# Altium PCB tof_sideXtal.PcbDoc (part 1 of 2)
Units mm, origin at the board's own origin, x right, y up, seen from the top; angles counter-clockwise.
Board outline 22 x 110.3 mm, 6 copper layers (Top Layer, Timing, InternalPlane1, InternalPlane2, Energy, Bottom Layer); 240 components, 145 nets, 707 pads, 213 vias.
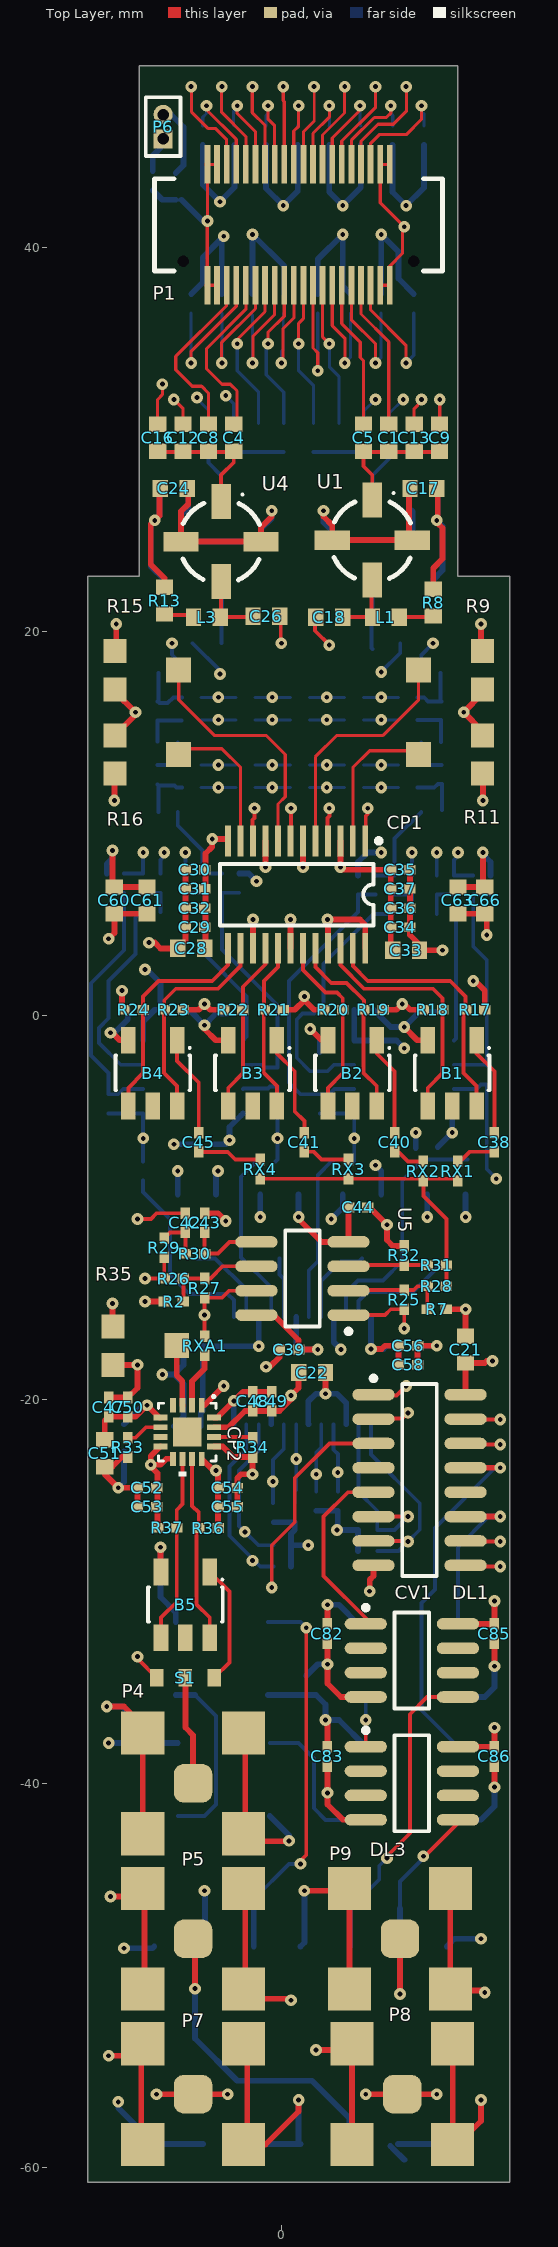
[diagram p0: Top Layer view]
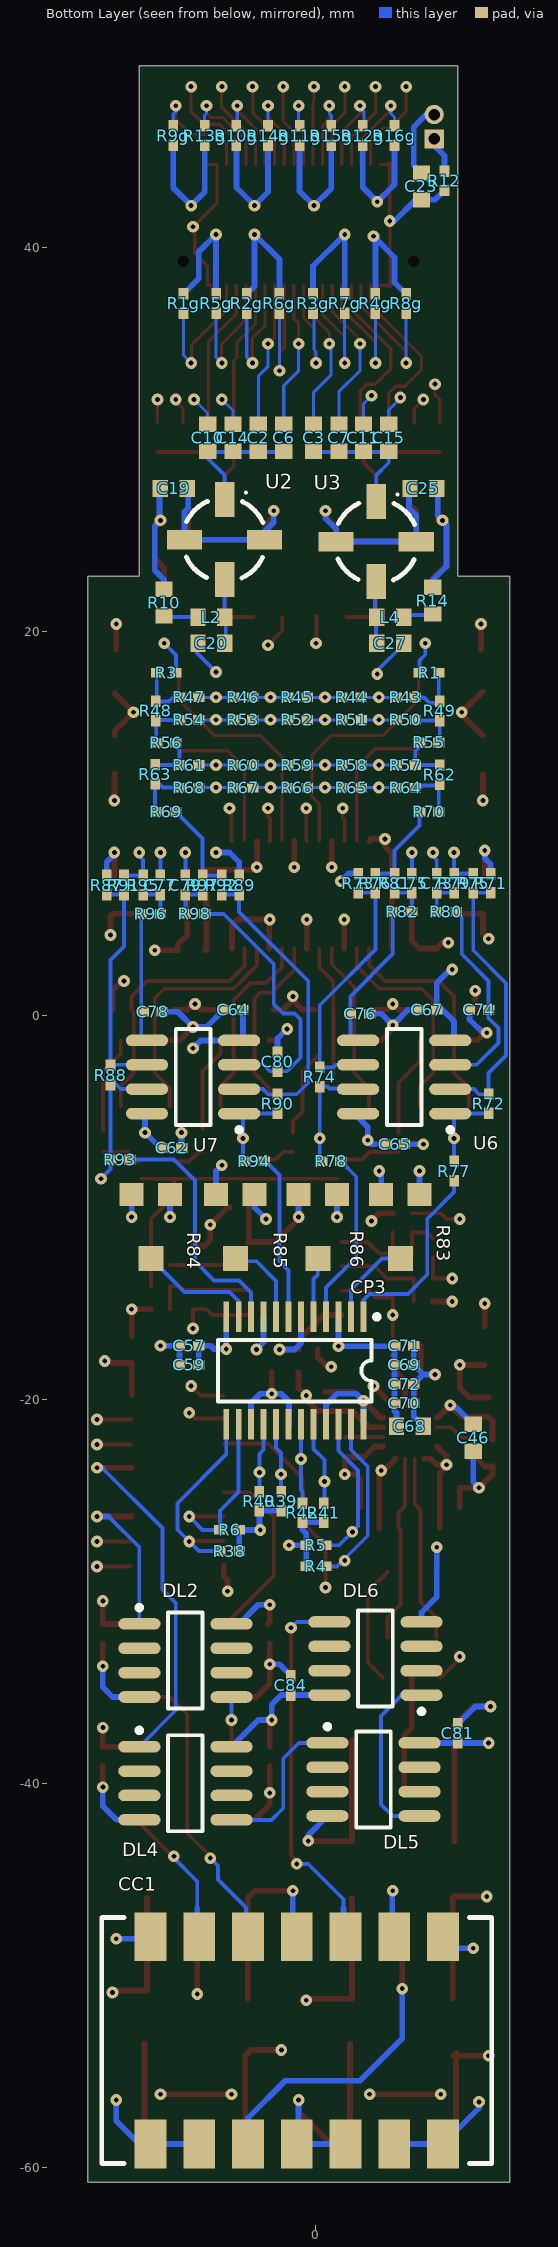
[diagram p1: Bottom Layer view, seen from below]
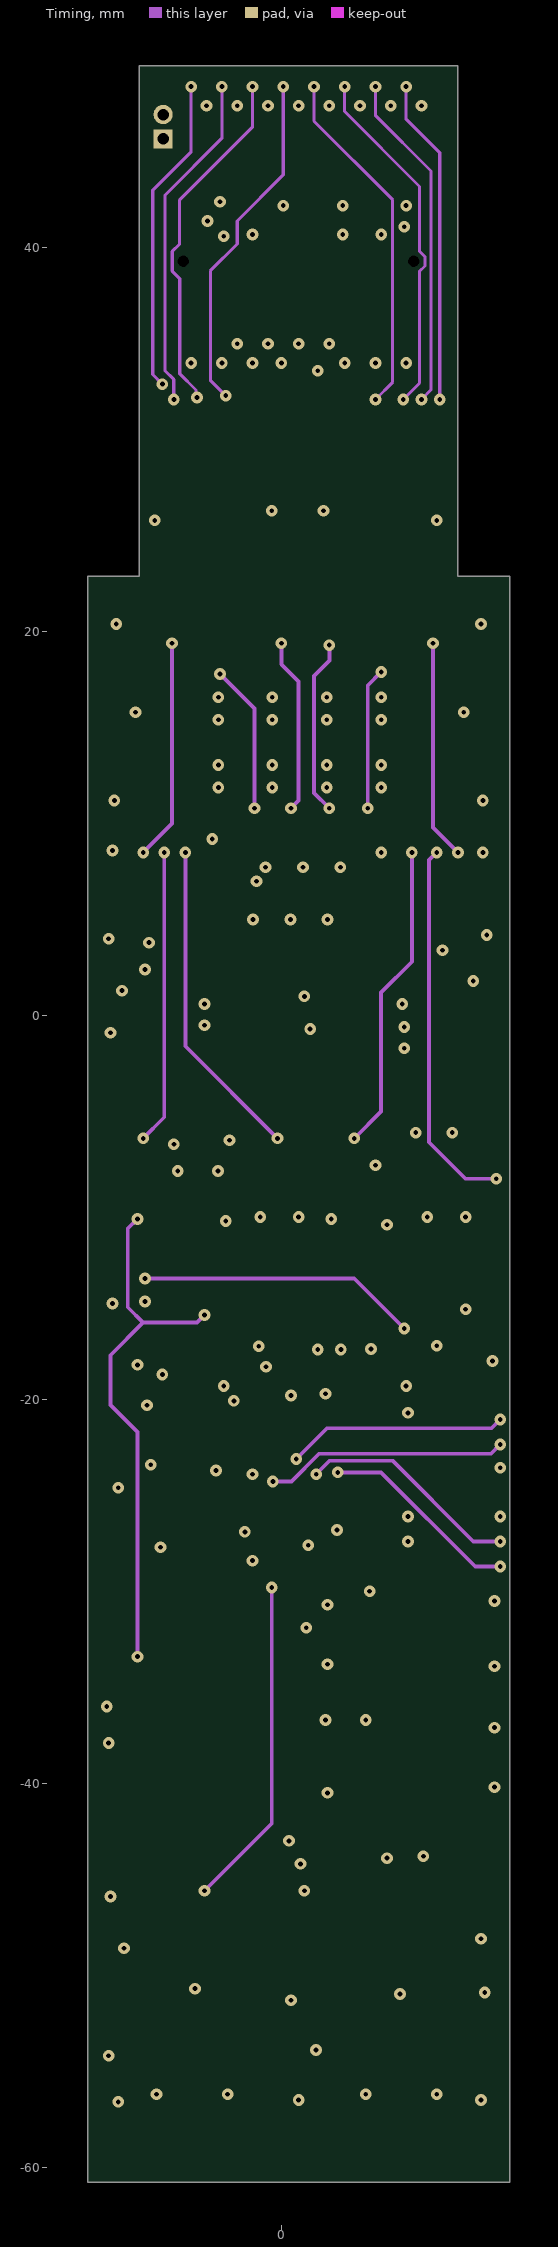
[diagram p2: Timing]
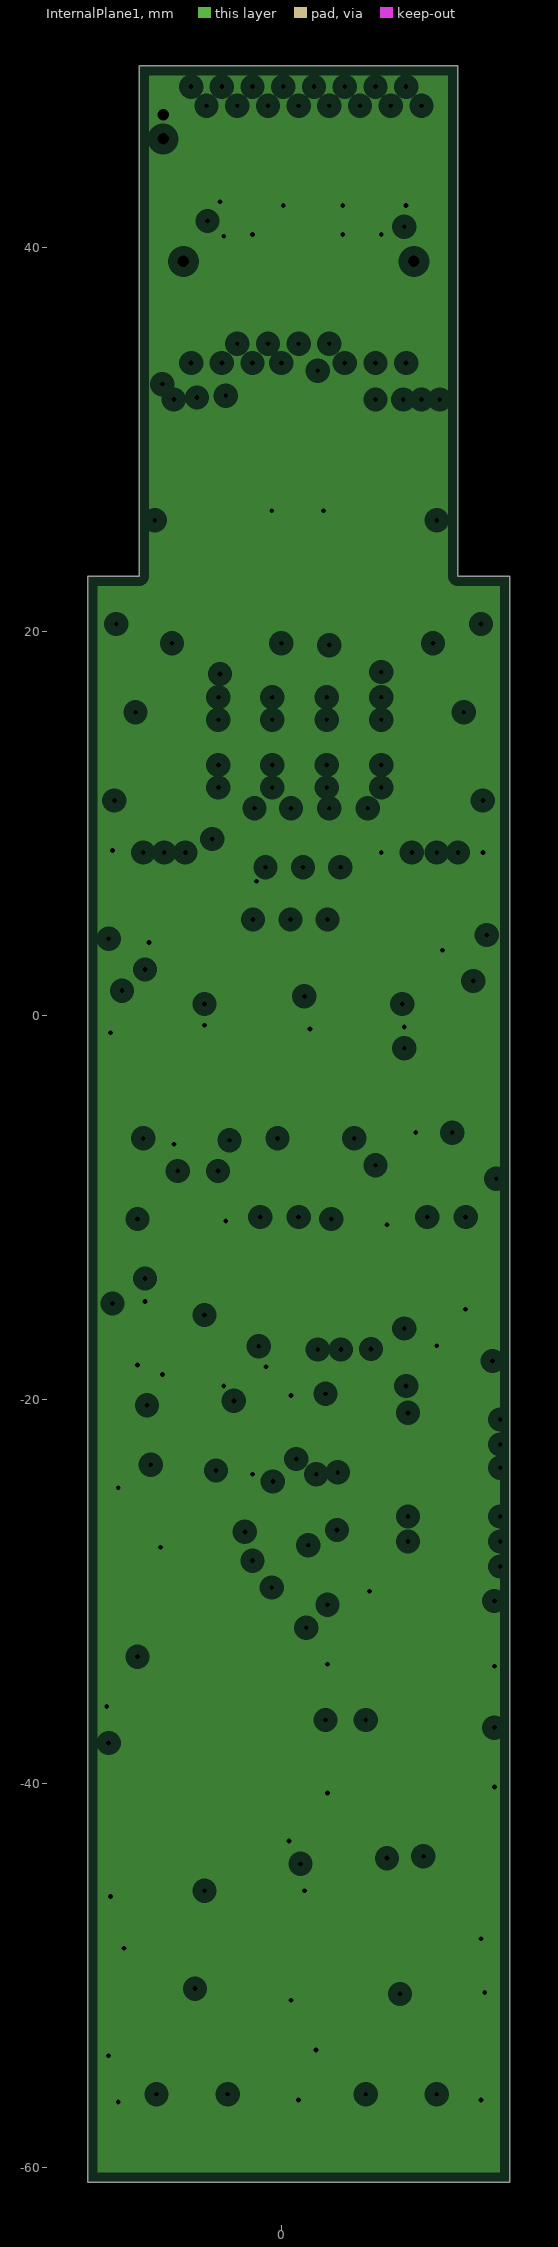
[diagram p3: InternalPlane1, clearances drawn from the general rule]
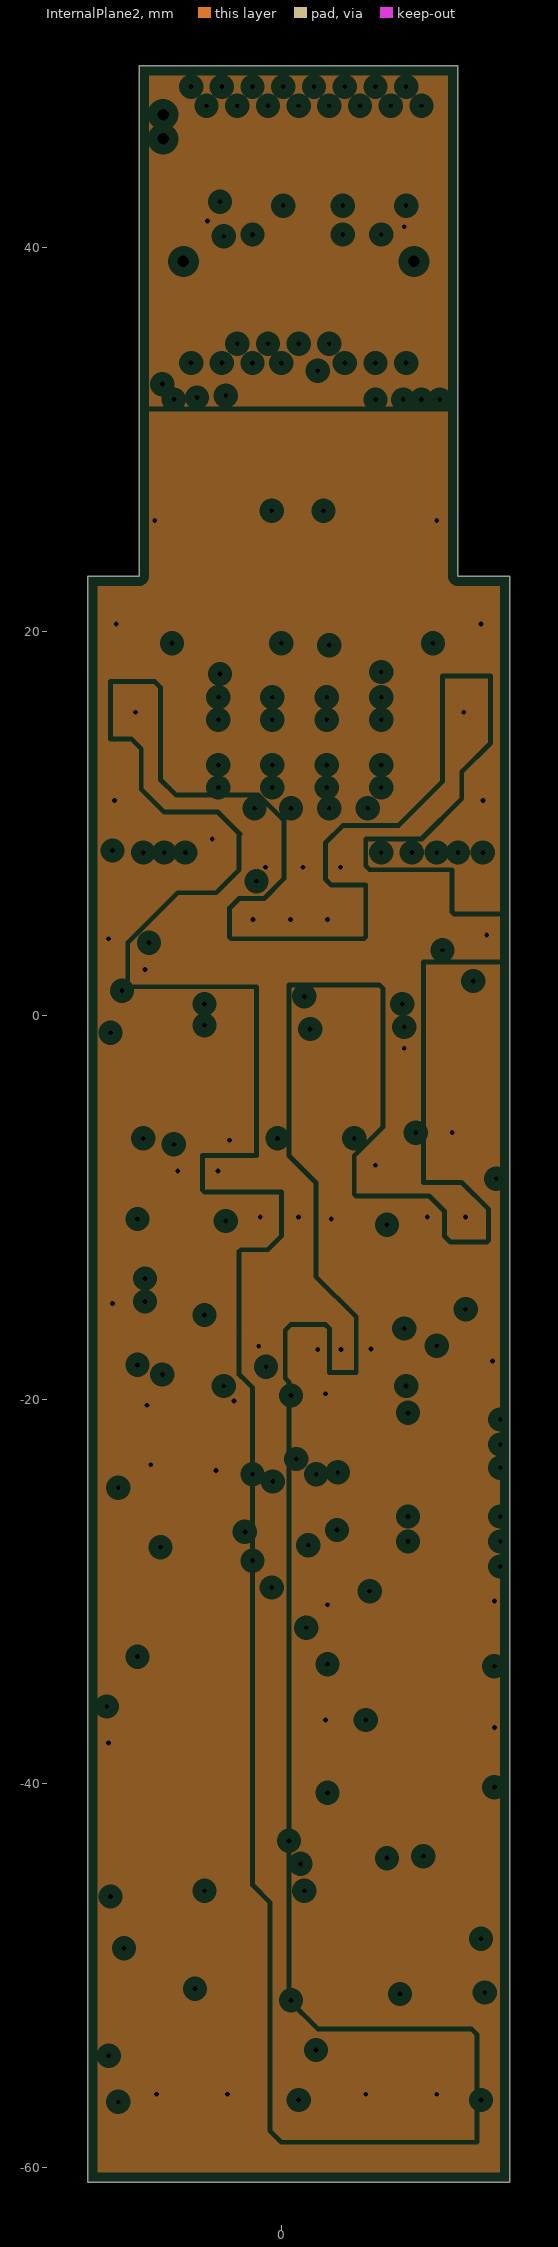
[diagram p4: InternalPlane2, clearances drawn from the general rule]
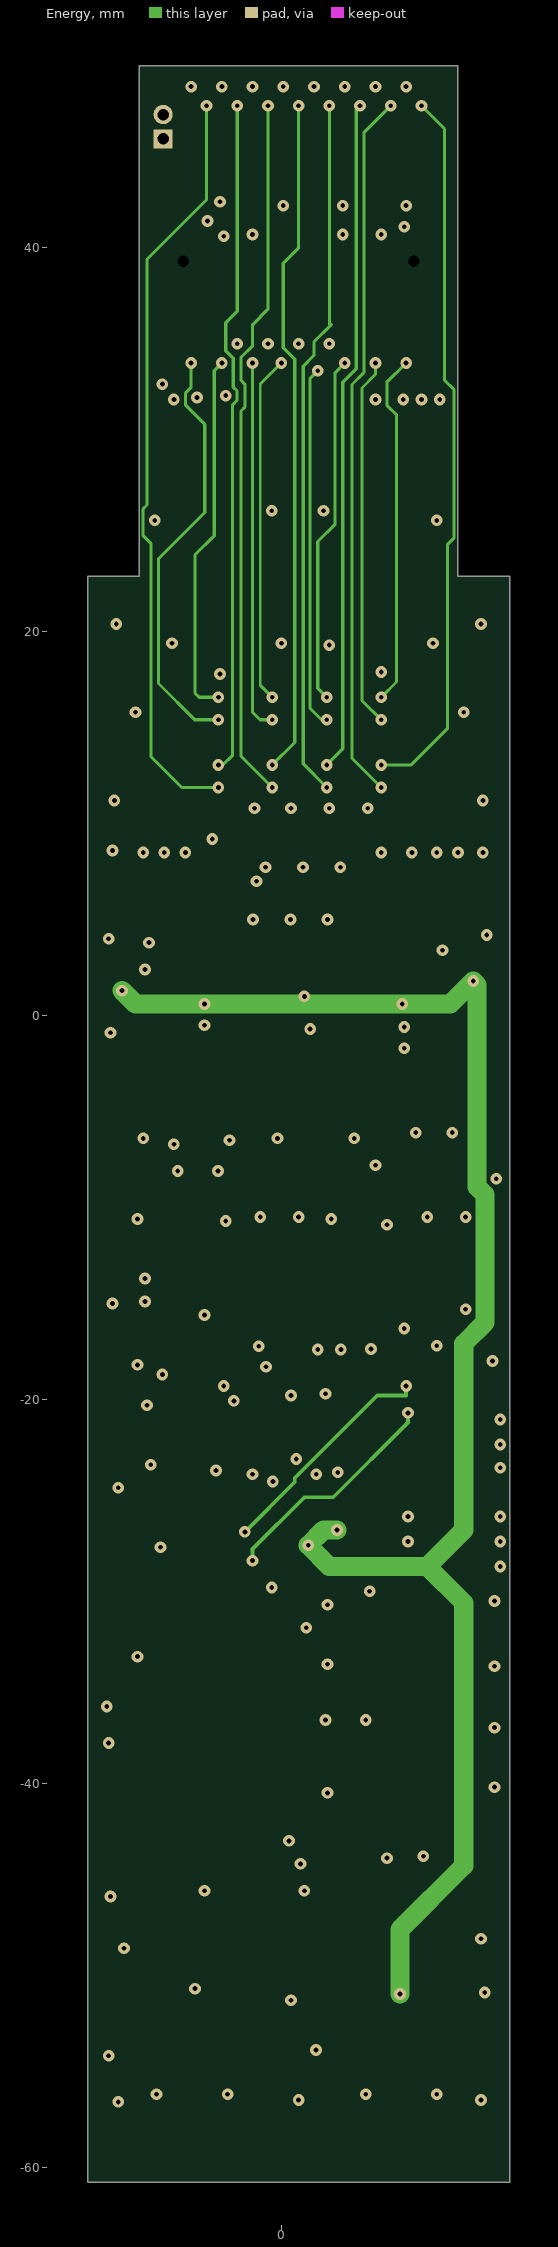
[diagram p5: Energy]

## Layer stack, top to bottom
Top Layer: signal copper 0.0356
Dielectric: prepreg 0.32, FR-4, Dk 4.8
Timing: signal copper 0.0356
Dielectric: core 0.32, FR-4, Dk 4.8
InternalPlane1: plane copper 0.0356, net GND
Dielectric: prepreg 0.32, FR-4, Dk 4.8
InternalPlane2: plane copper 0.0356, net (Multiple Nets)
Dielectric: core 0.32, FR-4, Dk 4.8
Energy: signal copper 0.0356
Dielectric: prepreg 0.32, FR-4, Dk 4.8
Bottom Layer: signal copper 0.0356

## Board outline
-10.1,-60.8 -10.1,22.9 -7.4,22.9 -7.4,49.5 9.2,49.5 9.2,22.9 11.9,22.9 11.9,-60.8

## Design rules (kind name [scope] priority, off if disabled: settings)
Clearance Clearance_2 [(InComponent('J1') OR InComponent('CP2'))] p1: gap=0.152
Clearance Clearance_1 [IsTrack vs IsVia OR IsPad] p2: gap=0.203
Clearance [All] p3: gap=0.16
ComponentClearance ComponentClearance_1 [(InComponent('P1') OR InComponentClass('PreAmpComps')) vs (InComponent('P6') OR InComponent('U1')OR InComponent('U2')OR InComponent('U3')OR InComponent('U4'))] p1: gap=0 collisioncheckmode=3 verticalgap=0 showdistances=FALSE
ComponentClearance [All] p2: gap=0.254 collisioncheckmode=3 verticalgap=0.254 showdistances=FALSE
HoleSize [All] p1: absolutevalues=TRUE maxlimit=2.54 minlimit=0.21 maxpercent=80.000 minpercent=20.000
MinimumAnnularRing [All] p1: minimumring=0.18
MinimumSolderMaskSliver MinimumSolderMaskSliver_1 [InComponent('SiPM1')] p1: minsoldermaskwidth=0.05
MinimumSolderMaskSliver [All] p2: minsoldermaskwidth=0.05
PasteMaskExpansion [InComponent('SiPM1')] p1: expansion=0
PlaneClearance [All] p1: clearance=0.508
PlaneConnect PlaneConnect_1 [IsVia AND InNet('GND')] p1: planeconnectstyle=Direct reliefexpansion=0.508 reliefentries=4 reliefconductorwidth=0.254 reliefairgap=0.254
PlaneConnect [All] p2: planeconnectstyle=Relief reliefexpansion=0.508 reliefentries=4 reliefconductorwidth=0.254 reliefairgap=0.254
PolygonConnect [All] p1: connectstyle=Relief reliefconductorwidth=0.254 reliefentries=4 polygonreliefangle="90 Angle"
RoutingTopology [All] p1: topology=Daisy_Balanced
RoutingVias [All] p1: holewidth=0.21 width=0.61 viastyle="Through Hole" minholewidth=0.203 minwidth=0.61 maxholewidth=0.5 maxwidth=0.75
SilkToSilkClearance [All] p1: silktosilkclearance=0.127
SilkscreenOverComponentPads SilkscreenOverComponentPads_1 [HasFootprint('J1-0603')] p1: minsilkscreentomaskgap=0.1
SilkscreenOverComponentPads [All] p2: minsilkscreentomaskgap=0.127
SolderMaskExpansion SolderMaskExpansion_1 [IsVia] p1: expansion=0.077
SolderMaskExpansion [All] p2: expansion=0.08
ViasUnderSMD [All] p1: allowed=FALSE
Width Width_3 [(InNet('+3V')AND OnLayer('Energy'))] p1: maxlimit=1 minlimit=0.254 preferedwidth=1 toplayer_maxwidth=0.254 toplayer_prefwidth=0.254 midlayer1_maxwidth=0.254 midlayer1_prefwidth=0.254 midlayer2_minwidth=1 bottomlayer_maxwidth=0.254 bottomlayer_prefwidth=0.254 minimp=50.000000 maximp=50.000000 favimp=50.000000
Width Width_2 [InNetClass('SiPMConns')] p2: maxlimit=0.165 minlimit=0.152 preferedwidth=0.16 minimp=50.000000 maximp=50.000000 favimp=50.000000
Width Width_1 [(InNet('GND') OR InNet('+5') OR InNet('-5')OR InNet('+3')OR InNet('+30'))] p3: maxlimit=0.5 minlimit=0.254 preferedwidth=0.5 toplayer_minwidth=0.3 toplayer_prefwidth=0.305 midlayer1_minwidth=0.5 midlayer2_maxwidth=0.381 midlayer2_prefwidth=0.305 bottomlayer_minwidth=0.3 bottomlayer_maxwidth=0.381 bottomlayer_prefwidth=0.305 minimp=50.000000 maximp=50.000000 favimp=50.000000
Width [All] p4: maxlimit=0.3 minlimit=0.152 preferedwidth=0.2 minimp=50.000000 maximp=50.000000 favimp=50.000000
19 further rules are at their usual default settings.

## Classes and differential pairs
component class to_sideXtal_energy_delays: C81 C82 C83 C84 C85 C86 CC1 DL1 DL2 DL3 DL4 DL5 DL6 P5 P6 P7 P8 P9
component class to_sideXtal_energy: C21 C22 C56 C57 C58 C59 C60 C61 C62 C63 C64 C65 C66 C67 C68 C69 C70 C71 C72 C73 C74 C75 C76 C77 C78 C79 C80 CP3 CV1 R1 R3 R4 R5 R6 R38 R39 R40 R41 R42 R43 R44 R45 R46 R47 R48 R49 R50 R51 R52 R53 R54 R55 R56 R57 R58 R59 R60 R61 R62 R63 R64 R65 R66 R67 R68 R69 R70 R71 R72 R73 R74 R75 R76 R77 R78 R79 R80 R81 R82 R83 R84 R85 R86 R87 R88 R89 R90 R91 R92 R93 R94 R95 R96 R97 R98 U6 U7
component class tof_sideXtal_timing2: B5 C38 C39 C40 C41 C42 C43 C44 C45 C46 C47 C48 C49 C50 C51 C52 C53 C54 C55 CP2 P4 R2 R7 R25 R26 R27 R28 R29 R30 R31 R32 R33 R34 R35 R36 R37 RX1 RX2 RX3 RX4 RXA1 S1 U5
component class tof_sideXtal_timing: B1 B2 B3 B4 C1 C2 C3 C4 C5 C6 C7 C8 C9 C10 C11 C12 C13 C14 C15 C16 C17 C18 C19 C20 C23 C24 C25 C26 C27 C28 C29 C30 C31 C32 C33 C34 C35 C36 C37 CP1 L1 L2 L3 L4 P1 R1g R2g R3g R4g R5g R6g R7g R8 R8g R9 R9g R10 R10g R11 R11g R12 R12g R13 R13g R14 R14g R15 R15g R16 R16g R17 R18 R19 R20 R21 R22 R23 R24 U1 U2 U3 U4
net class SiPMConns: NetC1_2 NetC2_2 NetC3_2 NetC4_2 NetC5_2 NetC6_2 NetC7_2 NetC8_2 NetC9_2 NetC10_2 NetC11_2 NetC12_2 NetC13_2 NetC14_2 NetC15_2 NetC16_2 NetP1_3 NetP1_5 NetP1_7 NetP1_9 NetP1_11 NetP1_13 NetP1_15 NetP1_17 NetP1_24 NetP1_26 NetP1_28 NetP1_30 NetP1_32 NetP1_34 NetP1_36 NetP1_38
component class PreAmpComps: C17 C19 C24 C25 R8 R10 R13 R14

## Components (designator, comment, footprint, x,y, rotation, side; value= is the part's Value field where it differs from the comment)
B1 "MABA-010125-TC1113" SM-22 8.9,-3 r0 top
B2 "MABA-010125-TC1113" SM-22 3.7,-3 r0 top
B3 "MABA-010125-TC1113" SM-22 -1.5,-3 r0 top
B4 "MABA-010125-TC1113" SM-22 -6.7,-3 r0 top
B5 "MABA-010125-TC1113" SM-22 -5,-30.7 r0 top
C1 "Cap" 1608[0603] 5.599,30.106 r90 top
C2 "Cap" 1608[0603] 2.999,30.106 r90 bottom (schematic designator C1)
C3 "Cap" 1608[0603] 0.122,30.106 r90 bottom (schematic designator C13)
C4 "Cap" 1608[0603] -2.478,30.106 r90 top (schematic designator C1)
C5 "Cap" 1608[0603] 4.278,30.106 r90 top
C6 "Cap" 1608[0603] 1.678,30.106 r90 bottom (schematic designator C5)
C7 "Cap" 1608[0603] -1.199,30.106 r90 bottom (schematic designator C9)
C8 "Cap" 1608[0603] -3.799,30.106 r90 top (schematic designator C5)
C9 "Cap" 1608[0603] 8.241,30.106 r90 top
C10 "Cap" 1608[0603] 5.641,30.106 r90 bottom (schematic designator C9)
C11 "Cap" 1608[0603] -2.478,30.106 r90 bottom (schematic designator C1)
C12 "Cap" 1608[0603] -5.12,30.106 r90 top (schematic designator C9)
C13 "Cap" 1608[0603] 6.92,30.106 r90 top
C14 "Cap" 1608[0603] 4.32,30.106 r90 bottom (schematic designator C13)
C15 "Cap" 1608[0603] -3.799,30.106 r90 bottom
C16 "Cap" 1608[0603] -6.441,30.106 r90 top (schematic designator C13)
C17 "Cap" 1608[0603] 7.402,27.464 r180 top
C18 "Cap" 1608[0603] 2.5,20.759 r180 top
C19 "Cap" 1608[0603] 7.402,27.464 r180 bottom (schematic designator C17)
C20 "Cap" 1608[0603] 5.447,19.4 r0 bottom (schematic designator C18)
C21 "Cap" 1608[0603] 9.6,-17.4 r90 top
C22 "Cap Pol3" 1608[0603] 1.6,-18.6 r180 top
C23 "Cap" 1608[0603] -5.5,43.2 r90 bottom
C24 "Cap" 1608[0603] -5.604,27.464 r0 top (schematic designator C17)
C25 "Cap" 1608[0603] -5.604,27.464 r0 bottom (schematic designator C17)
C26 "Cap" 1608[0603] -0.778,20.81 r0 top (schematic designator C18)
C27 "Cap" 1608[0603] -3.877,19.4 r180 bottom (schematic designator C18)
C28 "Cap Pol3" 1608[0603] -4.7,3.5 r180 top
C29 "Cap" 0402 -4.5,4.6 r0 top
C30 "Cap" 0402 -4.5,7.6 r0 top
C31 "Cap" 0402 -4.5,6.6 r0 top
C32 "Cap" 0402 -4.5,5.6 r0 top
C33 "Cap Pol3" 1608[0603] 6.5,3.4 r0 top
C34 "Cap" 0402 6.2,4.6 r180 top
C35 "Cap" 0402 6.2,7.6 r180 top
C36 "Cap" 0402 6.2,5.6 r180 top
C37 "Cap" 0402 6.2,6.6 r180 top
C38 "Cap" 0402 11.1,-6.6 r270 top
C39 "Cap" 0402 0.4,-17.4 r180 top
C40 "Cap" 0402 5.9,-6.6 r270 top
C41 "Cap" 0402 1.2,-6.6 r270 top
C42 "Cap" 0402 -5,-10.8 r90 top
C43 "Cap" 0402 -4,-10.8 r90 top
C44 "Cap" 0402 4,-10 r180 top
C45 "Cap" 0402 -4.3,-6.6 r270 top
C46 "Cap Pol3" 1608[0603] -8.2,-22 r270 bottom
C47 "Cap" 0402 -9,-20.4 r270 top
C48 "Cap" 0402 -1.5,-20.1 r90 top
C49 "Cap" 0402 -0.5,-20.1 r90 top
C50 "Cap" 0402 -8,-20.4 r270 top
C51 "Cap Pol3" 1608[0603] -9.2,-22.8 r270 top
C52 "Cap" 0402 -7,-24.6 r0 top
C53 "Cap" 0402 -7,-25.6 r0 top
C54 "Cap" 0402 -2.8,-24.6 r180 top
C55 "Cap" 0402 -2.8,-25.6 r180 top
C56 "Cap" 0402 6.6,-17.2 r180 top
C57 "Cap" 0402 6.608,-17.2 r180 bottom
C58 "Cap" 0402 6.6,-18.2 r180 top
C59 "Cap" 0402 6.608,-18.2 r180 bottom
C60 "Cap Pol3" 1608[0603] -8.7,6 r90 top
C61 "Cap Pol3" 1608[0603] -7,6 r90 top
C62 "Cap" 0402 7.5,-6.9 r180 bottom
C63 "Cap Pol3" 1608[0603] 9.2,6 r270 top
C64 "Cap" 0402 4.3,0.3 r0 bottom
C65 "Cap" 0402 -4.1,-6.7 r180 bottom
C66 "Cap Pol3" 1608[0603] 10.6,6 r270 top
C67 "Cap" 0402 -5.8,0.3 r0 bottom
C68 "Cap Pol3" 1608[0603] -4.9,-21.4 r180 bottom
C69 "Cap" 0402 -4.6,-18.2 r0 bottom
C70 "Cap" 0402 -4.6,-20.2 r0 bottom
C71 "Cap" 0402 -4.6,-17.2 r0 bottom
C72 "Cap" 0402 -4.6,-19.2 r0 bottom
C73 "Cap" 0402 -6.3,6.9 r90 bottom (schematic designator C77)
C74 "Cap" 0402 -8.5,0.3 r0 bottom
C75 "Cap" 0402 -5,6.9 r90 bottom (schematic designator C77)
C76 "Cap" 0402 -2.3,0.1 r180 bottom
C77 "Cap" 0402 8.1,6.8 r90 bottom
C78 "Cap" 0402 8.5,0.2 r180 bottom
C79 "Cap" 0402 6.8,6.8 r90 bottom (schematic designator C77)
C80 "Cap" 0402 2,-2.4 r90 bottom
C81 "Cap" 0402 -7.4,-37.4 r270 bottom
C82 "Cap" 0402 2.4,-32.2 r90 top
C83 "Cap" 0402 2.4,-38.6 r90 top
C84 "Cap" 0402 1.3,-34.9 r270 bottom
C85 "Cap" 0402 11.1,-32.2 r90 top
C86 "Cap" 0402 11.1,-38.6 r90 top
CC1 "JS4PS-1W" JS4PS-1W 1,-53.4 r0 bottom
CP1 "Max9602" TSSOP24 0.8,6.3 r180 top
CP2 "ADCMP572BCPZ-R2" CP_16_3 -4.9,-21.7 r270 top
CP3 "Max9602" TSSOP24 1.1,-18.5 r0 bottom
CV1 "TB5R1" SOIC16_N 7.2,-24.2 r0 top
DL1 "DS1100-100" SO8_N 6.8,-33.6 r0 top
DL2 "DS1100-100" SO8_N 6.8,-33.6 r180 bottom
DL3 "DS1100-100" SO8_N 6.8,-40 r0 top
DL4 "DS1100-100" SO8_N 6.8,-40 r180 bottom
DL5 "DS1100-100" SO8_N -3,-39.8 r180 bottom
DL6 "DS1100-100" SO8_N -3.1,-33.5 r0 bottom
L1 "Inductor" 1608[0603] 5.447,20.759 r0 top
L2 "Inductor" 1608[0603] 5.447,20.759 r0 bottom (schematic designator L1)
L3 "Inductor" 1608[0603] -3.877,20.759 r180 top (schematic designator L1)
L4 "Inductor" 1608[0603] -3.877,20.759 r180 bottom (schematic designator L1)
P1 "P1" DS17(3.0)-40DS-0.5(0.57) 0.9,41.2 r0 top
P4 "SMB" SMA-SMD -4.6,-40 r0 top
P5 "SMB" SMA-SMD -4.6,-48.1 r0 top
P6 "SMB" MHDR1X2 -6.161,45.676 r90 top
P7 "SMB" SMA-SMD -4.6,-56.2 r0 top
P8 "SMB" SMA-SMD 6.3,-56.2 r0 top
P9 "SMB" SMA-SMD 6.18,-48.1 r0 top
R1 "Res3" 0402 -5.898,17.853 r0 bottom
R1g "Res3" 0402 6.896,37.1 r270 bottom
R2 "Res3" 0402 -5.6,-14.9 r180 top
R2g "Res3" 0402 3.602,37.1 r270 bottom
R3 "Res3" 0402 7.793,17.853 r180 bottom
R3g "Res3" 0402 0.15,37.1 r270 bottom
R4 "Res3" 0402 0,-28.7 r180 bottom
R4g "Res3" 0402 -3.1,37.1 r270 bottom
R5 "Res3" 0402 0,-27.6 r180 bottom
R5g "Res3" 0402 5.2,37.1 r270 bottom
R6 "Res3" 0402 4.5,-26.8 r0 bottom
R6g "Res3" 0402 1.9,37.1 r270 bottom
R7 "Res3" 0402 8.1,-15.3 r0 top
R7g "Res3" 0402 -1.5,37.1 r270 bottom
R8 "Res3" 1608[0603] 7.91,21.521 r270 top
R8g "Res3" 0402 -4.7,37.1 r270 bottom
R9 "RPot SM" POT-3MM-SMD 8.6,18 r180 top
R9g "Res3" 0402 7.436,45.852 r90 bottom
R10 "Res3" 1608[0603] 7.91,21.521 r270 bottom (schematic designator R8)
R10g "Res3" 0402 4.142,45.852 r90 bottom
R11 "RPot SM" POT-3MM-SMD 8.6,13.6 r180 top
R11g "Res3" 0402 0.848,45.852 r90 bottom
R12 "Res3" 0402 -6.7,43.5 r90 bottom
R12g "Res3" 0402 -2.446,45.852 r90 bottom
R13 "Res3" 1608[0603] -6.087,21.622 r270 top (schematic designator R8)
R13g "Res3" 0402 5.789,45.852 r90 bottom
R14 "Res3" 1608[0603] -6.087,21.622 r270 bottom (schematic designator R8)
R14g "Res3" 0402 2.495,45.852 r90 bottom
R15 "RPot SM" POT-3MM-SMD -6.8,18 r0 top
R15g "Res3" 0402 -0.799,45.852 r90 bottom
R16 "RPot SM" POT-3MM-SMD -6.8,13.6 r0 top
R16g "Res3" 0402 -4.093,45.852 r90 bottom
R17 "Res3" 0402 10.1,0.3 r180 top
R18 "Res3" 0402 7.9,0.3 r0 top
R19 "Res3" 0402 4.8,0.3 r180 top
R20 "Res3" 0402 2.7,0.3 r0 top
R21 "Res3" 0402 -0.4,0.3 r180 top
R22 "Res3" 0402 -2.5,0.3 r0 top
R23 "Res3" 0402 -5.6,0.3 r180 top
R24 "Res3" 0402 -7.7,0.3 r0 top
R25 "Res3" 0402 6.4,-14.8 r90 top
R26 "Res3" 0402 -5.6,-13.7 r180 top
R27 "Res3" 0402 -4,-14.2 r90 top
R28 "Res3" 0402 8.1,-14.1 r180 top
R29 "Res3" 0402 -6.1,-12.1 r270 top
R30 "Res3" 0402 -4.5,-12.4 r180 top
R31 "Res3" 0402 8.1,-13 r180 top
R32 "Res3" 0402 6.4,-12.5 r90 top
R33 "Res3" 0402 -8,-22.5 r90 top
R34 "Res3" 0402 -1.5,-22.5 r270 top
R35 "RPot SM" POT-3MM-SMD -6.9,-17.2 r0 top
R36 "Res3" 0402 -3.8,-26.7 r180 top
R37 "Res3" 0402 -5.953,-26.682 r0 top
R38 "Res3" 0402 4.5,-27.9 r0 bottom
R39 "Res3" 0402 1.814,-25.3 r90 bottom
R40 "Res3" 0402 2.943,-25.3 r90 bottom
R41 "Res3" 0402 -0.4,-25.9 r90 bottom
R42 "Res3" 0402 0.7,-25.9 r90 bottom
R43 "Res3" 0402 -4.679,16.577 r180 bottom
R44 "Res3" 0402 -1.859,16.577 r180 bottom
R45 "Res3" 0402 0.96,16.577 r180 bottom
R46 "Res3" 0402 3.78,16.577 r180 bottom
R47 "Res3" 0402 6.599,16.577 r180 bottom
R48 "Res3" 0402 8.352,15.872 r90 bottom
R49 "Res3" 0402 -6.457,15.872 r90 bottom
R50 "Res3" 0402 -4.679,15.402 r180 bottom
R51 "Res3" 0402 -1.859,15.402 r180 bottom
R52 "Res3" 0402 0.96,15.402 r180 bottom
R53 "Res3" 0402 3.78,15.402 r180 bottom
R54 "Res3" 0402 6.599,15.402 r180 bottom
R55 "Res3" 0402 -5.898,14.227 r180 bottom
R56 "Res3" 0402 7.793,14.221 r0 bottom
R57 "Res3" 0402 -4.679,13.053 r180 bottom
R58 "Res3" 0402 -1.859,13.053 r180 bottom
R59 "Res3" 0402 0.96,13.053 r180 bottom
R60 "Res3" 0402 3.78,13.053 r180 bottom
R61 "Res3" 0402 6.599,13.053 r180 bottom
R62 "Res3" 0402 -6.457,12.545 r90 bottom
R63 "Res3" 0402 8.377,12.57 r90 bottom
R64 "Res3" 0402 -4.679,11.878 r180 bottom
R65 "Res3" 0402 -1.859,11.878 r180 bottom
R66 "Res3" 0402 0.96,11.878 r180 bottom
R67 "Res3" 0402 3.78,11.878 r180 bottom
R68 "Res3" 0402 6.599,11.878 r180 bottom
R69 "Res3" 0402 7.793,10.614 r0 bottom
R70 "Res3" 0402 -5.898,10.614 r180 bottom
R71 "Res3" 0402 -9.1,6.9 r90 bottom (schematic designator R87)
R72 "Res3" 0402 -9,-4.6 r90 bottom (schematic designator R88)
R73 "Res3" 0402 -2.2,6.9 r90 bottom (schematic designator R87)
R74 "Res3" 0402 -0.2,-3.2 r90 bottom
R75 "Res3" 0402 -8.2,6.9 r90 bottom (schematic designator R91)
R76 "Res3" 0402 -3.1,6.9 r90 bottom (schematic designator R91)
R77 "Res3" 0402 -7.2,-8.1 r90 bottom (schematic designator R93)
R78 "Res3" 0402 -0.8,-7.6 r0 bottom
R79 "Res3" 0402 -7.2,6.9 r90 bottom (schematic designator R95)
R80 "Res3" 0402 -6.8,5.4 r0 bottom (schematic designator R96)
R81 "Res3" 0402 -4.1,6.9 r90 bottom (schematic designator R95)
R82 "Res3" 0402 -4.5,5.4 r180 bottom (schematic designator R96)
R83 "RPot SM" POT-3MM-SMD -4.4,-11.2 r270 bottom
R84 "RPot SM" POT-3MM-SMD 8.6,-11.2 r270 bottom
R85 "RPot SM" POT-3MM-SMD 4.2,-11.2 r270 bottom
R86 "RPot SM" POT-3MM-SMD -0.1,-11.2 r270 bottom
R87 "Res3" 0402 10.9,6.8 r90 bottom
R88 "Res3" 0402 10.7,-3.1 r90 bottom
R89 "Res3" 0402 4,6.8 r90 bottom (schematic designator R87)
R90 "Res3" 0402 2,-4.6 r90 bottom
R91 "Res3" 0402 10,6.8 r90 bottom
R92 "Res3" 0402 4.9,6.8 r90 bottom (schematic designator R91)
R93 "Res3" 0402 10.2,-7.5 r0 bottom
R94 "Res3" 0402 3.2,-7.6 r0 bottom
R95 "Res3" 0402 9,6.8 r90 bottom
R96 "Res3" 0402 8.6,5.3 r180 bottom
R97 "Res3" 0402 5.9,6.8 r90 bottom (schematic designator R95)
R98 "Res3" 0402 6.3,5.3 r0 bottom (schematic designator R96)
RX1 "Res3" 0402 9.2,-8.1 r90 top
RX2 "Res3" 0402 7.4,-8.1 r90 top
RX3 "Res3" 0402 3.5,-8 r90 top
RX4 "Res3" 0402 -1.1,-8 r90 top
RXA1 "Res3" 0402 -4,-17.2 r90 top
S1 "SwitchSMD_3" SwitchSMD_0603 -5,-34.5 r180 top
U1 "MAR-3SM" WW107 4.735,24.772 r180 top
U2 "MAR-3SM" WW107 4.76,24.796 r0 bottom (schematic designator U1)
U3 "MAR-3SM" WW107 -3.14,24.696 r0 bottom (schematic designator U1)
U4 "MAR-3SM" WW107 -3.14,24.696 r180 top (schematic designator U1)
U5 "THS3202" SO-8_N 1.1,-13.7 r180 top
U6 "THS3202" SO-8_N -4.6,-3.2 r0 bottom
U7 "THS3202" SO-8_N 6.4,-3.2 r0 bottom

## Footprints (in the part's own frame and the unit in brackets; to place one, negate y for a bottom-side part, rotate by r counter-clockwise, add the part's x,y. Pads: shape width x height; smd on the part's side, far side on the other; paste and mask are expansions set on the pad)
0402 [mm] "Chip Capacitor, Body 1.0x0.5mm, IPC High Density"
  rect 0.6x0.5 smd: 1(-0.5,0) 2(0.5,0)
  body extent -0.55,-0.3 0.55,0.3, height 1.3
1608[0603] [mm] "Chip Capacitor, Body 1.6x0.8mm, IPC High Density"
  rect 0.8x0.9 smd: 1(-0.7,0) 2(0.7,0)
  body extent -0.87,-0.48 0.87,0.48, height 1.3
CP_16_3 [mm]
  rect 0.74x0.305 smd mask+0.04: 1(-1.397,0.75) 2(-1.397,0.25) 3(-1.397,-0.25) 4(-1.397,-0.75) 9(1.397,-0.75) 10(1.397,-0.25) 11(1.397,0.25) 12(1.397,0.75)
  rect 0.305x0.74 smd mask+0.04: 5(-0.75,-1.397) 6(-0.25,-1.397) 7(0.25,-1.397) 8(0.75,-1.397) 13(0.75,1.397) 14(0.25,1.397) 15(-0.25,1.397) 16(-0.75,1.397)
  rect 1.5x1.5 smd mask-0.813: 17(0,0)
  silkscreen extent -1.86,-1.5 2.31,1.5
DS17(3.0)-40DS-0.5(0.57) [mm]
  rect 0.3x2 smd mask+0.05: 1(4.75,-3.15) 2(4.25,-3.15) 3(3.75,-3.15) 4(3.25,-3.15) 5(2.75,-3.15) 6(2.25,-3.15) 7(1.75,-3.15) 8(1.25,-3.15) 9(0.75,-3.15) 10(0.25,-3.15) 11(-0.25,-3.15) 12(-0.75,-3.15) 13(-1.25,-3.15) 14(-1.75,-3.15) 15(-2.25,-3.15) 16(-2.75,-3.15) 17(-3.25,-3.15) 18(-3.75,-3.15) 19(-4.25,-3.15) 20(-4.75,-3.15) 21(-4.75,3.15) 22(-4.25,3.15) 23(-3.75,3.15) 24(-3.25,3.15) 25(-2.75,3.15) 26(-2.25,3.15) 27(-1.75,3.15) 28(-1.25,3.15) 29(-0.75,3.15) 30(-0.25,3.15) 31(0.25,3.15) 32(0.75,3.15) 33(1.25,3.15) 34(1.75,3.15) 35(2.25,3.15) 36(2.75,3.15) 37(3.25,3.15) 38(3.75,3.15) 39(4.25,3.15) 40(4.75,3.15)
  round 0 hole 0.6 unplated: 41(6,-1.9) 42(-6,-1.9)
  silkscreen extent -7.5,-2.4 7.5,2.4
JS4PS-1W [mm]
  rect 1.65x2.54 smd: 1(-7.62,-5.4) 2(-5.08,-5.4) 3(-2.54,-5.4) 4(0,-5.4) 5(2.54,-5.4) 6(5.08,-5.4) 7(7.62,-5.4) 8(7.62,5.4) 9(5.08,5.4) 10(2.54,5.4) 11(0,5.4) 12(-2.54,5.4) 13(-5.08,5.4) 14(-7.62,5.4)
  silkscreen extent -10.16,-6.42 10.16,6.42
MHDR1X2 [mm] "Connector; Header; 2 Position"
  rect 1x1 hole 0.6: 1(0,0)
  round 1 hole 0.6: 2(1.27,0)
  silkscreen extent -0.9,-0.9 2.17,0.9
POT-3MM-SMD [mm] "Square Trimming Potentiometer"
  rect 1.2x1.25 smd: CCW(-1.875,-1) CW(-1.875,1)
  rect 1.3x1.3 smd: W(1.45,0)
SM-22 [mm] "SOT-23/SC-74A; 5 Leads; Body 3 x 3 mm, inc. leads (LxW max)"
  rect 0.76x1.4 smd: 1(1.27,-1.715) 2(0,-1.715) 3(-1.27,-1.715) 4(-1.27,1.715) 5(1.27,1.715)
  silkscreen extent -1.95,-0.89 1.97,1.36
SMA-SMD [mm]
  rrect50% 2x2 smd: 1(0,0)
  rect 2.25x2.25 smd: 2(-2.625,-2.625) 2(-2.625,2.625) 2(2.625,-2.625) 2(2.625,2.625)
SO8_N [mm] "SOIC, 8-Leads, Body 4.9x3.9mm, Pitch 1.27mm, IPC Medium Density"
  oval 2.2x0.6 smd: 1(-2.4,1.905) 2(-2.4,0.635) 3(-2.4,-0.635) 4(-2.4,-1.905) 5(2.4,-1.905) 6(2.4,-0.635) 7(2.4,0.635) 8(2.4,1.905)
  silkscreen extent -2.52,-2.5 0.9,2.88, body extent -2,-2.5 2,2.5, height 1.75
SO-8_N [mm] "SOIC, 8-Leads, Body 4.9x3.9mm, Pitch 1.27mm, IPC Medium Density"
  oval 2.2x0.6 smd: 1(-2.4,1.905) 2(-2.4,0.635) 3(-2.4,-0.635) 4(-2.4,-1.905) 5(2.4,-1.905) 6(2.4,-0.635) 7(2.4,0.635) 8(2.4,1.905)
  silkscreen extent -2.53,-2.5 0.9,2.88, body extent -1.95,-2.45 1.95,2.45, height 1.75
SOIC16_N [mm] "SOIC, 16-Leads, Body 9.9x3.9mm, Pitch 1.27mm, IPC Medium Density"
  oval 2.2x0.6 smd: 1(-2.4,4.445) 2(-2.4,3.175) 3(-2.4,1.905) 4(-2.4,0.635) 5(-2.4,-0.635) 6(-2.4,-1.905) 7(-2.4,-3.175) 8(-2.4,-4.445) 9(2.4,-4.445) 10(2.4,-3.175) 11(2.4,-1.905) 12(2.4,-0.635) 13(2.4,0.635) 14(2.4,1.905) 15(2.4,3.175) 16(2.4,4.445)
  silkscreen extent -2.52,-5 0.9,5.42, body extent -2,-5 2,5, height 1.91
SwitchSMD_0603 [mm] "3 pins 0603"
  rect 0.7x0.9 smd: 1(-1.5,0) 2(1.5,0) 3(0,0)
  body extent -1.6,-0.48 1.6,0.48, height 0.9
TSSOP24 [mm] "Shrink Small Outline; 24 Leads; Body Width 4.4 mm; Pitch 0.65 mm"
  rect 0.3x1.6 smd: 1(-3.575,-2.8) 2(-2.925,-2.8) 3(-2.275,-2.8) 4(-1.625,-2.8) 5(-0.975,-2.8) 6(-0.325,-2.8) 7(0.325,-2.8) 8(0.975,-2.8) 9(1.625,-2.8) 10(2.275,-2.8) 11(2.925,-2.8) 12(3.575,-2.8) 13(3.575,2.8) 14(2.925,2.8) 15(2.275,2.8) 16(1.625,2.8) 17(0.975,2.8) 18(0.325,2.8) 19(-0.325,2.8) 20(-0.975,2.8) 21(-1.625,2.8) 22(-2.275,2.8) 23(-2.925,2.8) 24(-3.575,2.8)
  silkscreen extent -4.4,-2.92 4,1.6
WW107 [mm] "SOT-23/SC-74A; 5 Leads; Body 3 x 3 mm, inc. leads (LxW max)"
  rect 1.02x1.83 smd: 1(0,-2.085) 3(0,2.085)
  rect 1.83x1.02 smd: 2(2.085,0) 4(-2.085,0)
  silkscreen extent -1.99,-2.5 1.99,1.99

## Part data
C1 C2 C3 C4 C5 C6 C7 C8 C9 C10 C11 C12 C13 C14 C15 C16 C17 C18 C19 C20 C21 C23 C24 C25 C26 C27 C29 C30 C31 C32 C34 C35 C36 C37 C38 C39 C40 C41 C42 C43 C44 C45 C47 C48 C49 C50 C52 C53 C54 C55 C56 C57 C58 C59 C62 C64 C65 C67 C69 C70 C71 C72 C73 C74 C75 C76 C77 C78 C79 C80 C81 C82 C83 C84 C85 C86: "Capacitor"
C22 C28 C33 C46 C51 C60 C61 C63 C66 C68: "Polarized Capacitor (Surface Mount)"
CP2: "Imported"
DL1 DL2 DL3 DL4 DL5 DL6: library part DS1100-500
P1: library part Sensl-ArrayC-30035-16P-PCB
P4 P5 P6 P7 P8 P9: "SMB Straight Connector"
R1 R1g R2 R2g R3 R3g R4 R4g R5 R5g R6 R6g R7 R7g R8 R8g R9g R10 R10g R11g R12 R12g R13 R13g R14 R14g R15g R16g R17 R18 R19 R20 R21 R22 R23 R24 R25 R26 R27 R28 R29 R30 R31 R32 R33 R34 R36 R37 R38 R39 R40 R41 R42 R43 R44 R45 R46 R47 R48 R49 R50 R51 R52 R53 R54 R55 R56 R57 R58 R59 R60 R61 R62 R63 R64 R65 R66 R67 R68 R69 R70 R71 R72 R73 R74 R75 R76 R77 R78 R79 R80 R81 R82 R87 R88 R89 R90 R91 R92 R93 R94 R95 R96 R97 R98 RX1 RX2 RX3 RX4 RXA1: "Resistor"
R9 R11 R15 R16 R35 R83 R84 R85 R86: "Square Trimming Potentiometer"
U1 U2 U3 U4: library part MAR-3SM+
U5 U6 U7: library part AD8002AR, "Dual 600MHz, 50mW Current Feedback Amplifier"

## Via types
v1: diameter 0.61, hole 0.25, Top Layer to Bottom Layer, 213 vias

## Nets (pads, with @x,y where several pads share a name; then routed paths per layer and width w, separated by ;. In a path a pad name is that pad's centre, name@x,y a point inside that pad or via, vN(x,y) a via of type N, cw(c..) or ccw(c..) an arc to the next point about the centre after c; other vN are vias at no path point)
+3V: P9.1 R4.1 R5.1 R6.1 R17.1 R18.1 R19.1 R20.1 R21.1 R22.1 R23.1 R24.1 R38.1 R39.1 R40.1 R41.1 R42.1 | length 105.2
  Top Layer w0.3: v1(-8.3,1.3) -8.3,0.4 R24.1@-8.2,0.3 ; R23.1@-5.1,0.3 -4.3,0.3 v1(-4,0.6) -3.7,0.3 R22.1@-3,0.3 ; R21.1@0.1,0.3 0.7,0.3 v1@1.2,0.8 ; v1(1.2,1) v1@1.2,0.8 ; R20.1@2.2,0.3 1.7,0.3 v1@1.2,0.8 ; R19.1@5.3,0.3 6,0.3 v1(6.3,0.6) 6.4,0.6 6.7,0.3 R18.1@7.4,0.3 ; v1(6.18,-50.98) P9.1@6.18,-48.6 ; v1(10,1.8) 10.1,1.8 10.6,1.3 R17.1@10.6,0.3
  Energy w1: v1(-8.3,1.3) -7.6,0.6 v1(-4,0.6) 1.2,0.6 v1(6.3,0.6) 8.8,0.6 v1(10,1.8) 10.2,1.6 10.2,-8.074 10.192,-8.082 10.192,-8.918 10.608,-9.334 10.608,-15.992 9.5,-17.1 9.5,-26.8 7.6,-28.7 ; v1(2.9,-26.8) 2.2,-26.8 v1(1.4,-27.6) 2.5,-28.7 7.6,-28.7 ; v1(6.18,-50.98) 6.18,-47.62 9.5,-44.3 9.5,-30.6 7.6,-28.7
  Bottom Layer w0.3: R41.1@-0.4,-26.4 R42.1@0.7,-26.4 0.7,-26.8 0.5,-27 R5.1@0.5,-27.6 R4.1@0.5,-28.7 ; R5.1@0.6,-27.6 v1(1.4,-27.6) ; R39.1@1.814,-25.8 R40.1@2.943,-25.8 2.943,-26.757 2.986,-26.8 R6.1@4,-26.8 R38.1@4,-27.9
+5V: C17.1 C19.1 C21.1 C22.1 C24.1 C25.1 C28.1 C29.2 C30.2 C31.2 C32.2 C39.1 C46.1 C47.2 C48.2 C49.2 C50.2 C51.1 C52.2 C53.2 C54.2 C55.2 C56.2 C57.2 C58.2 C59.2 C60.1 C61.1 C62.1 C65.1 C81.2 C82.2 C83.2 C84.2 C85.2 C86.2 CP1.6 CP1.12 CP1.15 CP1.18 CP1.21 CP1.24 CP2.5 CP2.8 CP2.9 CP2.12 CP2.16 CP3.6 CP3.12 CP3.15 CP3.18 CP3.21 CP3.24 CV1.16 DL1.8 DL2.8 DL3.8 DL4.8 DL5.8 DL6.8 P7.1 R8.1 R9.CCW R10.1 R11.CW R13.1 R14.1 R15.CW R16.CCW R35.CW R36.1 R37.1 R83.CW R84.CW R85.CW R86.CW U5.8 U6.8 U7.8 | length 128.8
  Top Layer w0.3: C51.1@-9.2,-22.1 -9.2,-21.1 C47.2@-9,-20.9 C50.2@-8,-20.9 -7.6,-20.9 v1(-7,-20.3) -6.35,-20.95 CP2.5@-6.297,-20.95 ; v1(-9,4) -8.7,4.3 C60.1@-8.7,5.3 C61.1@-7,5.3 ; v1(-8.8,-15) -8.8,-16.175 R35.CW@-8.775,-16.2 ; v1(-8.7,11.2) R16.CCW@-8.7,12.575 ; R15.CW@-8.6,19.075 v1(-8.6,20.4) ; v1@-6.7,-23.6 -6.453,-23.847 -6.453,-24.6 -6.453,-25.6 R37.1@-6.453,-26.682 ; v1(-6.5,-56.2) P7.1@-4.6,-56.2 v1(-2.8,-56.2) ; C24.1@-6.354,27.464 -6.354,26.046 v1(-6.6,25.8) -6.8,25.6 -6.8,23.5 -6.087,22.787 R13.1@-6.087,22.372 ; CP2.8@-6.297,-22.45 -6.8,-22.953 v1(-6.8,-23.4) -6.3,-23.4 -5.997,-23.097 CP2.9@-5.65,-23.097 ; CP2.12@-4.15,-23.097 -3.474,-23.773 -3.3,-23.947 C54.2@-3.3,-24.6 C55.2@-3.3,-25.6 R36.1@-3.3,-26.7 ; C28.1@-3.95,3.5 -3.95,4.6 -3.95,5.6 -3.95,6.6 -3.95,7.6 -3.95,8.45 -3.6,8.8 v1(-3.6,9.2) -2.875,9.2 CP1.12@-2.775,9.1 ; CP2.16@-3.503,-20.95 -3.35,-20.95 v1(-2.475,-20.075) -2,-19.6 C48.2@-1.5,-19.6 C49.2@-0.5,-19.6 ; v1@-1.5,5 -1.488,4.988 -1.475,4.975 CP1.15@-1.475,3.5 ; U5.8@-1.35,-15.605 U5.8@-1.3,-15.605 -0.395,-15.605 0.9,-16.9 C39.1@0.9,-17.3 ; CP1.18@0.475,3.5 v1@0.475,4.975 ; C39.1@0.9,-17.4 C39.1@0.9,-17.3 ; v1@1.1,7.7 v1(1.125,7.725) CP1.6@1.125,9.1 ; v1(1.9,-17.4) 1,-17.4 0.95,-17.35 C39.1@0.9,-17.3 ; v1(2.3,-36.7) 2.4,-36.8 C83.2@2.4,-38.1 ; v1(2.3,-19.7) C22.1@2.3,-18.6 ; v1(2.4,-30.7) 2.4,-31.6 2.45,-31.65 C82.2@2.5,-31.7 ; CP1.21@2.425,3.5 2.425,4.975 v1(2.4,5) 4.1,5 4.375,4.725 CP1.24@4.375,3.5 ; v1(4.675,-17.375) 5.225,-17.375 5.4,-17.2 C56.2@6.1,-17.2 6.1,-18.1 6.05,-18.15 C58.2@6,-18.2 ; R8.1@7.91,22.271 7.91,23.31 8.4,23.8 8.4,25.4 8.152,25.648 8.152,25.8 C17.1@8.152,27.464 ; DL3.8@9.2,-38.095 11.095,-38.095 C86.2@11.1,-38.1 v1(11.1,-37.1) ; DL1.8@9.2,-31.695 11.095,-31.695 11.1,-31.69 v1(11.1,-30.5) ; CV1.16@9.6,-19.755 C21.1@9.6,-18.1 10.6,-18.1 10.7,-18 v1(11,-18) ; R9.CCW@10.4,19.075 v1(10.4,20.4) ; R11.CW@10.475,12.6 10.5,12.575 v1(10.5,11.2)
  Bottom Layer w0.3: v1(-9,-37.9) C81.2@-7.4,-37.9 -5.405,-37.9 DL5.8@-5.4,-37.895 ; C46.1@-8.2,-21.3 -7.2,-20.3 v1(-7,-20.3) ; C25.1@-6.354,27.464 -6.354,26.046 v1(-6.6,25.8) -6.8,25.6 -6.8,23.4 -6.087,22.687 R14.1@-6.087,22.372 ; R83.CW@-5.4,-9.325 v1(-5.4,-8.1) ; C65.1@-3.6,-6.7 -2.9,-6.7 v1(-2.7,-6.5) -2.7,-5.805 -2.1,-5.205 U6.8@-2,-5.105 ; CP3.24@-2.475,-21.3 v1(-2.475,-20.075) -2.1,-19.7 -1.1,-19.7 -0.525,-20.275 CP3.21@-0.525,-21.3 ; v1(-1.1,-10.5) R86.CW@-1.1,-9.325 ; DL6.8@-0.7,-35.405 -0.695,-35.4 C84.2@1.3,-35.4 1.8,-35.4 2.3,-35.9 v1(2.3,-36.7) 3.005,-36.7 DL4.8@4.4,-38.095 ; CP3.6@0.775,-15.7 0.775,-17.075 1.1,-17.4 v1(1.9,-17.4) ; CP3.18@1.425,-21.3 1.4,-21.275 1.4,-20.1 1.8,-19.7 v1(2.3,-19.7) 2.9,-19.7 3.375,-20.175 CP3.15@3.375,-21.3 ; v1(2.4,-30.7) 3,-30.7 3.995,-31.695 DL2.8@4.4,-31.695 ; v1(2.6,-10.6) 3.2,-10 R85.CW@3.2,-9.325 ; CP3.12@4.675,-15.7 v1(4.675,-17.375) 5.325,-17.375 5.5,-17.2 C57.2@6.108,-17.2 C59.2@6.108,-18.2 ; v1(7.6,-10.5) R84.CW@7.6,-9.325 ; R10.1@7.91,22.271 7.91,22.71 8.4,23.2 8.4,25.5 v1(8.1,25.8) ; C62.1@8.15,-6.85 v1(8.9,-6.1) U7.8@8.9,-5.205 ; v1@8.152,25.852 C19.1@8.152,27.464
  other v1: -3.4,-23.7 -1.475,5 0.475,5
+30: P6.1 R12.2 | length 1.9
  Bottom Layer w0.3: R12.2@-6.7,44 -6.7,44.8 -6.161,45.339 P6.1@-6.161,45.676
+HV: C23.1 P1.1 P1.2 P1.19 P1.20 P1.21 P1.22 P1.39 P1.40 R12.1 | length 19
  Top Layer w0.165: P1.19@-3.35,38.05 P1.20@-3.85,38.05 -3.858,38.058 -3.858,41.4 -3.858,41.408 -3.85,41.416 P1.21@-3.85,44.35 P1.22@-3.35,44.35 ; P1.2@5.15,38.05 P1.1@5.65,38.05 5.65,39.05 6.314,39.714 6.314,41.014 v1(6.4,41.1) 5.15,42.35 P1.39@5.15,44.35 P1.40@5.65,44.35
  Top Layer w0.3: v1@-3.858,41.408 v1(-3.85,41.4) ; P1.21@-3.858,44.342 P1.21@-3.85,44.35
  Bottom Layer w0.165: C23.1@-5.5,42.5 C23.1@-5.2,42.5
  Bottom Layer w0.3: R12.1@-6.7,43 -6.2,42.5 C23.1@-5.5,42.5 ; C23.1@-5.2,42.5 -4.1,41.4 v1(-3.85,41.4)
-5V: C33.1 C34.2 C35.2 C36.2 C37.2 C44.2 C63.2 C64.1 C66.2 C67.1 C68.1 C69.2 C70.2 C71.2 C72.2 CP1.3 CP1.9 CP3.3 CP3.9 P8.1 R9.CW R11.CCW R15.CCW R16.CW R83.CCW R84.CCW R85.CCW R86.CCW U5.4 U6.4 U7.4 | length 51.8
  Top Layer w0.3: R16.CW@-8.675,14.6 -7.6,15.675 v1(-7.6,15.8) R15.CCW@-8.675,16.875 ; CP1.9@-0.825,9.1 v1(-0.825,7.725) v1@-0.8,7.7 ; v1(0.9,-10.5) 0.9,-10.6 2.095,-11.795 U5.4@3.5,-11.795 3.55,-11.795 3.525,-11.77 3.5,-11.745 C44.2@3.5,-10 ; CP1.3@3.075,9.1 v1(3.075,7.725) ; v1@3.1,7.7 v1(3.075,7.725) ; v1(4.4,-56.2) P8.1@6.3,-56.2 v1(8.1,-56.2) ; C33.1@5.75,3.4 5.7,3.45 C34.2@5.7,4.6 C36.2@5.7,5.6 C37.2@5.7,6.6 C35.2@5.7,7.6 3.2,7.6 v1(3.075,7.725) ; C63.2@9.2,5.3 C66.2@10.6,5.3 10.7,5.2 v1(10.7,4.2) ; R11.CCW@10.475,14.6 10.475,14.825 v1(9.5,15.8) R9.CW@10.475,16.775
  Bottom Layer w0.3: U6.4@-7.2,-1.295 -7.2,-0.3 -6.6,0.3 C67.1@-6.3,0.3 -6.3,1.7 -7,2.4 v1(-7.1,2.4) ; C68.1@-4.2,-21.4 -4.2,-20.7 -4.1,-20.6 C70.2@-4.1,-20.2 C72.2@-4.1,-19.2 C69.2@-4.1,-18.2 C71.2@-4.1,-17.2 -4.075,-17.225 v1(-1.175,-17.225) CP3.3@-1.175,-15.7 ; R83.CCW@-3.4,-9.325 v1@-3.4,-8.2 ; v1(0.9,-10.5) R86.CCW@0.9,-9.325 ; CP3.9@2.725,-15.7 2.725,-17.025 v1(3.1,-17.4) ; C64.1@3.8,0.3 3.8,-1.295 U7.4@4,-1.295 5.995,-1.295 v1(6.4,-1.7) ; v1(4.9,-7.8) 5.2,-8.1 R85.CCW@5.2,-9.325 ; v1(9.6,-10.5) R84.CCW@9.6,-9.325
  other v1: -3.3,-8.1